# Allegro board AVRUSB500.brd
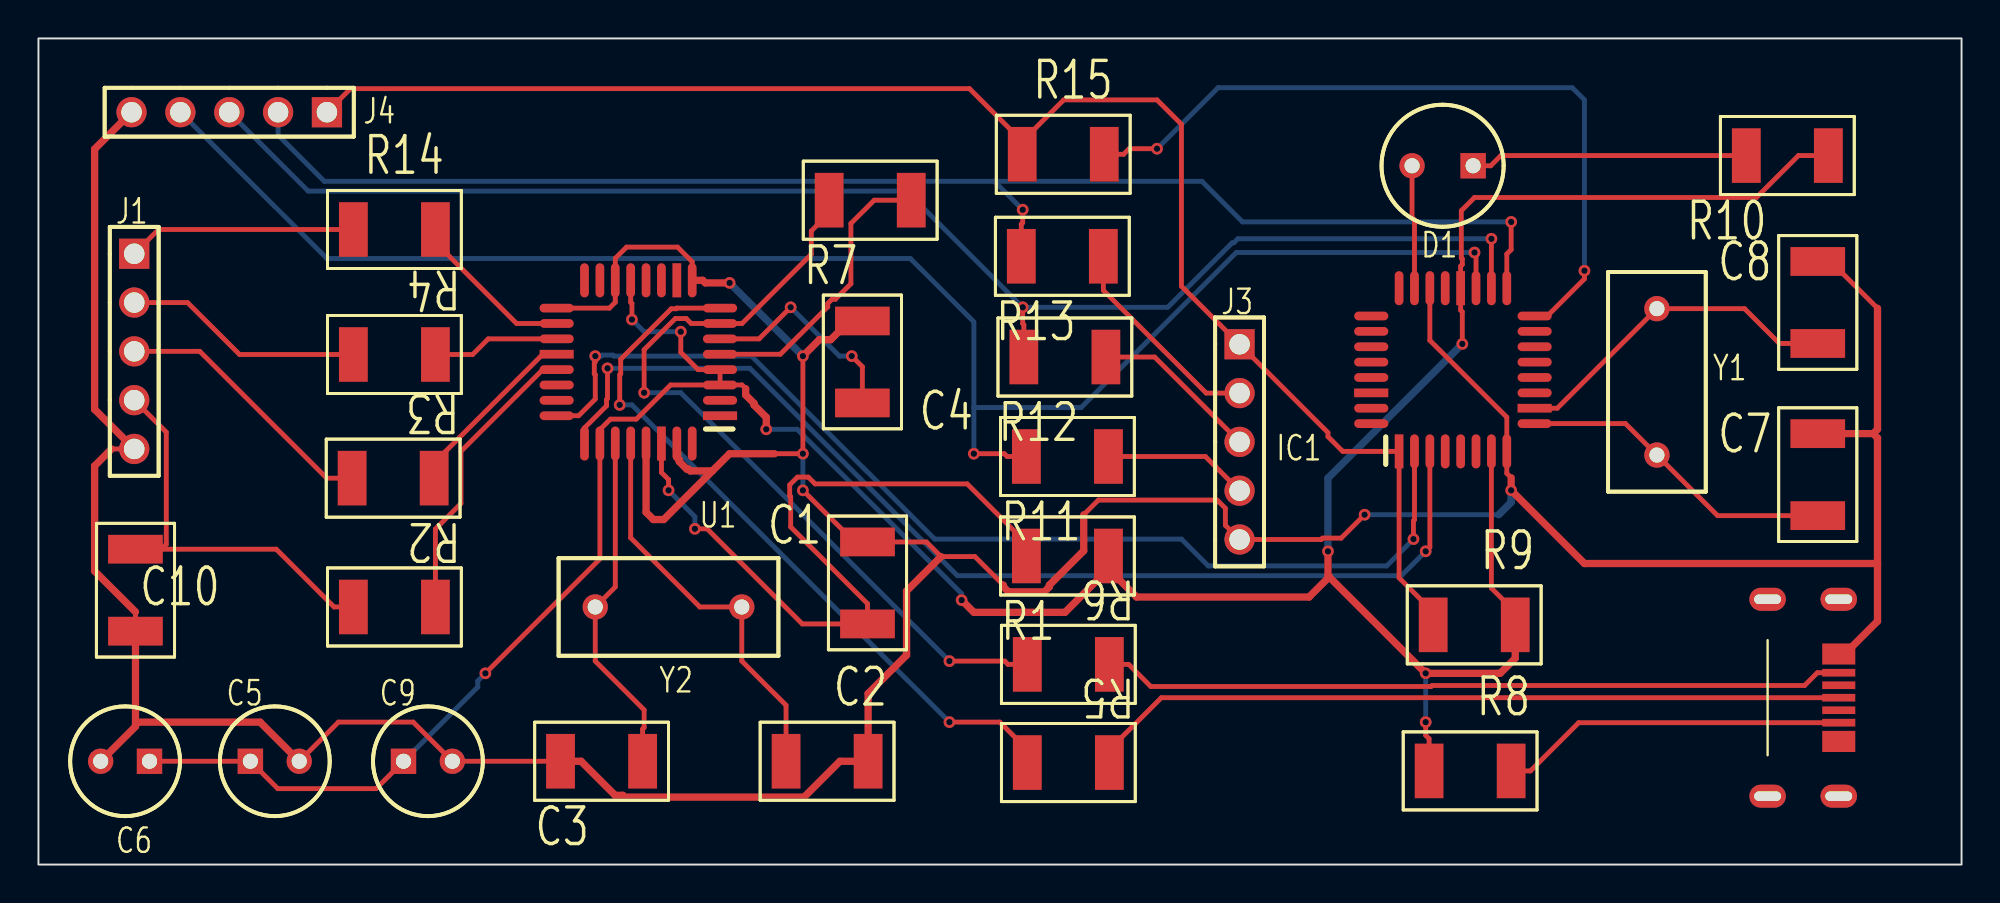
[diagram p0: board, top side]
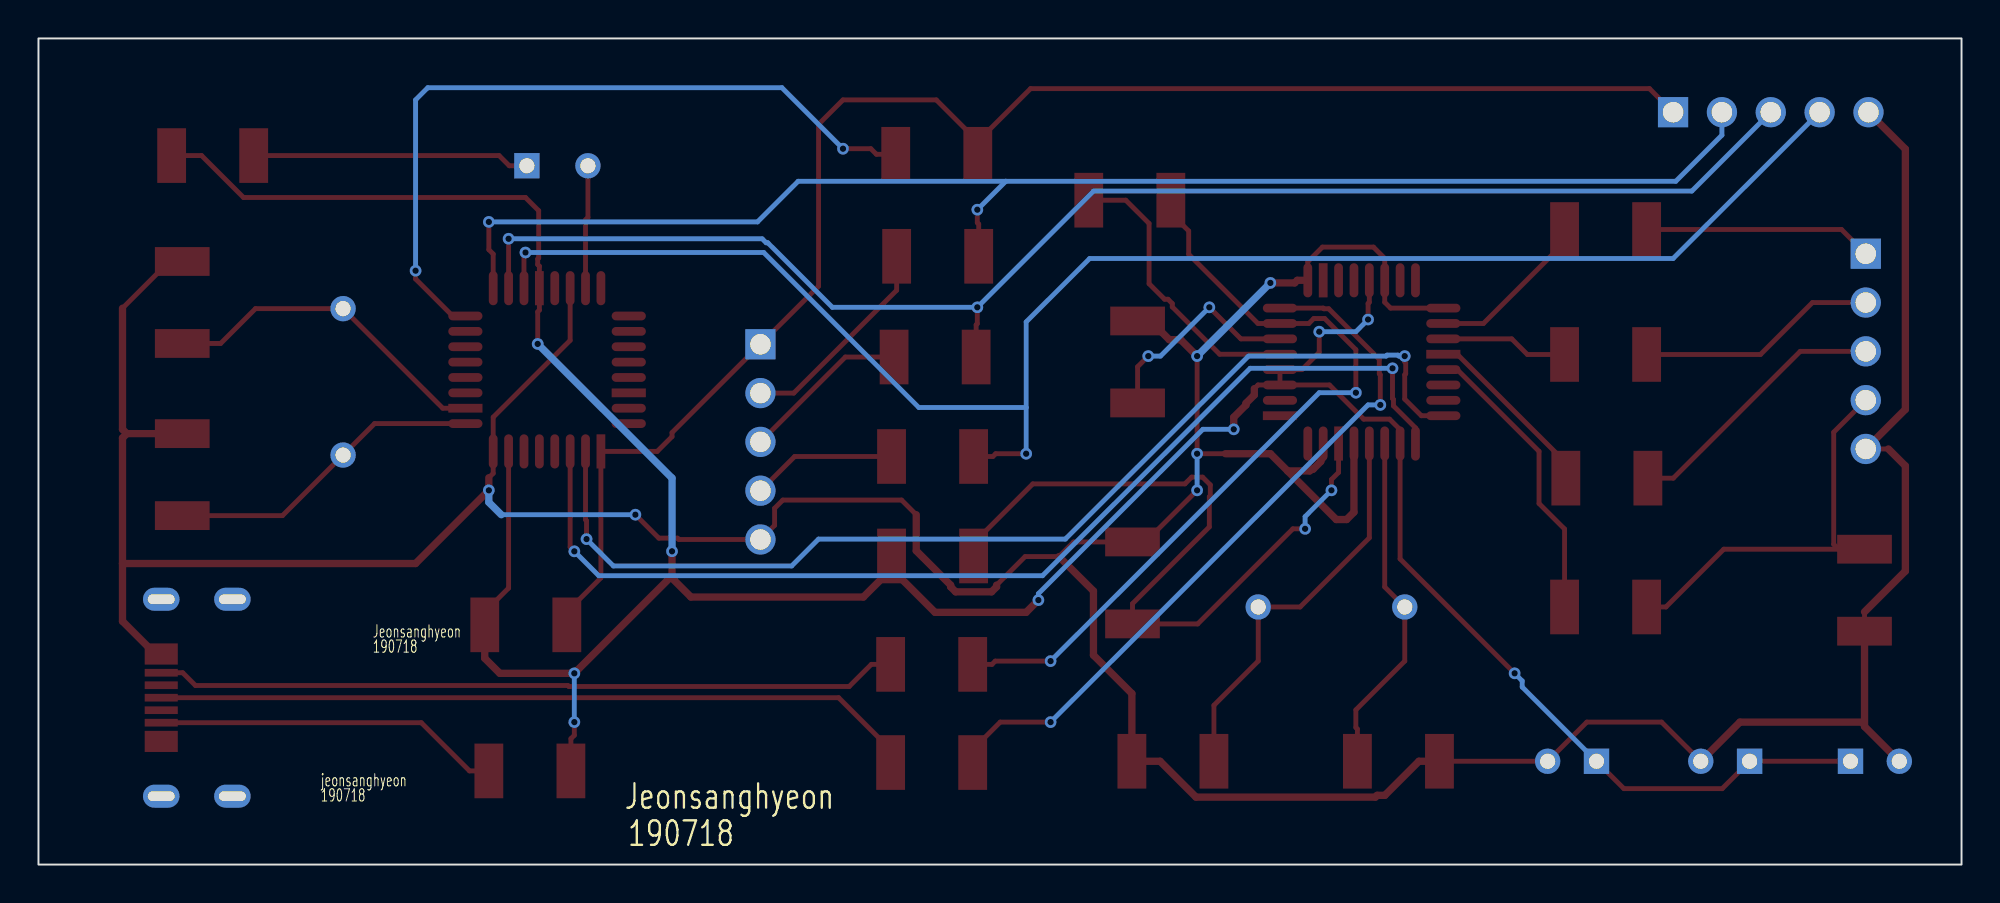
[diagram p1: board, bottom side, seen from below]

Outline 100 x 43 mm; copper layers: TOP, BOTTOM. Coordinates in mm from the lower left corner of the outline.
Outline path: rectangle 0,0 100,43

## Design rules (mm)
constraint set DEFAULT: min track width 0.254
net group POWERNETS: nets GND VCC

## Placement (name value [footprint] x y rotation side)
C1  47nF  [CPCYL1D225LS100031#2]  43.11 16.79 270 top
C2  27pF  [CPCYL1D225LS100031#2]  43.14 5.38 180 top
C3  27pF  [CPCYL1D225LS100031#2]  27.15 5.38 0 top
C4  47nF  [CPCYL1D225LS100031#2]  42.84 24.03 90 top
C5  100nF  [CPCYL1D225LS100031]  11.02 5.38 0 top
C6  1uF  [CPCYL1D225LS100031]  5.78 5.38 180 top
C7  100nF  [CPCYL1D225LS100031#2]  92.52 22.43 270 top
C8  100nF  [CPCYL1D225LS100031#2]  92.52 31.39 270 top
C9  100nF  [CPCYL1D225LS100031]  18.98 5.38 0 top
C10  22nF  [CPCYL1D225LS100031#2]  5.04 12.15 90 top
D1  LED  [CYLD250LS125031]  74.6 36.37 180 top
IC1  ATmega8  [QUAD80M32WG900]  70.75 21.5 0 top
J1  bbpg_Bitbang  [BLKCON100VHTM1SQSW1005]  4.98 31.79 270 top
J2  USBA  [MICRO_USB]  89.92 8.69 270 top
J3  avrusb500_out  [BLKCON100VHTM1SQSW1005]  62.46 27.08 270 top
J4  firmware_in  [BLKCON100VHTM1SQSW1005]  15 39.16 180 top
R1  470  [AX400X100031]  51.37 16.06 0 top
R2  220  [AX400X100031]  20.64 13.41 180 top
R3  220  [AX400X100031]  20.58 20.11 180 top
R4  220  [AX400X100031]  20.64 26.55 180 top
R5  27  [AX400X100031]  55.69 5.31 180 top
R6  27  [AX400X100031]  55.69 10.42 180 top
R7  1.5k  [AX400X100031]  41.12 34.58 0 top
R8  2.2  [AX400X100031]  76.58 4.88 180 top
R9  10k  [AX400X100031]  76.79 12.48 180 top
R10  470  [AX400X100031]  88.81 36.9 0 top
R11  1k  [AX400X100031]  51.37 21.24 0 top
R12  220  [AX400X100031]  51.24 26.42 0 top
R13  1k  [AX400X100031]  51.11 31.66 0 top
R14  220  [AX400X100031]  20.64 33.05 180 top
R15  220  [AX400X100031]  55.42 36.97 180 top
U1  FT232BM  [QUAD80M32WG900]  35.44 23.36 90 top
Y1  3.6864Mhz  [RAD450X200LS300031]  84.16 28.93 270 top
Y2  6Mhz  [RAD450X200LS300031]  36.57 13.41 180 top

## Library data of the parts
C1-C4 C7 C8 C10 = CAPACITOR NON-POL: alternate symbols: (SML2015)
C5 C9 = CAPACITOR NON-POL: alternate symbols: (SMDCAP)
C6 = CAPACITOR POL: alternate symbols: (SMDCAP)
D1 = LED
IC1 = ATmega8-DIL28_1
J1 J3 J4 = CON5
J2 = CON4_7
R1-R15 = R: alternate symbols: (SML2015)
U1 = FT232BM_2: alternate symbols: (JEDECMS026)
Y1 Y2 = ZTA

## Footprints (pads in the part's own frame, mm; a bottom-side part is the same pattern mirrored in y, then rotated)
AX400X100031
  rect 1.499x2.845 smd: 1(0,0) 2(4.267,0)
BLKCON100VHTM1SQSW1005
  rect 1.575x1.575 hole 1.067: 1(0,0)
  round 1.575 hole 1.067: 2(2.54,0) 3(5.08,0) 4(7.62,0) 5(10.16,0)
CPCYL1D225LS100031
  rect 1.321x1.321 hole 0.787: 1(0,0)
  round 1.321 hole 0.787: 2(2.54,0)
CPCYL1D225LS100031#2
  rect 1.499x2.845 smd: 1(0,0) 2(4.267,0)
CYLD250LS125031
  rect 1.321x1.321 hole 0.787: 1(0,0)
  round 1.321 hole 0.787: 2(3.175,0)
MICRO_USB
  oval 1.2x1.9 hole 0.5x1.4: (-5.125,3.7) (-5.125,0) (5.125,3.7) (5.125,0)
  rect 0.4x1.72 smd: (-0.65,3.7) (0.65,3.7) 2(-1.3,3.7) 3(0,3.7) 4(1.3,3.7)
  rect 1.1x1.72 smd: 1(-2.275,3.7) 5(2.275,3.7)
QUAD80M32WG900
  rect 0.457x1.778 smd: 1(0,0) 20(3.2,8.496)
  oval 0.457x1.778 smd: 2(0.8,0) 3(1.6,0) 4(2.4,0) 5(3.2,0) 6(4,0) 7(4.801,0) 8(5.601,0) 17(5.601,8.496) 18(4.801,8.496) 19(4,8.496) 21(2.4,8.496) 22(1.6,8.496) 23(0.8,8.496) 24(0,8.496)
  oval 1.778x0.457 smd: 9(7.048,1.448) 11(7.048,3.048) 12(7.048,3.848) 13(7.048,4.648) 14(7.048,5.448) 15(7.048,6.248) 16(7.048,7.048) 25(-1.448,7.048) 26(-1.448,6.248) 27(-1.448,5.448) 28(-1.448,4.648) 29(-1.448,3.848) 31(-1.448,2.248) 32(-1.448,1.448)
  rect 1.778x0.457 smd: 10(7.048,2.248) 30(-1.448,3.048)
RAD450X200LS300031
  round 1.321 hole 0.787: 1(0,0) 2(7.62,0)

## Nets
+5V: J2.4 R8.1
GND: C1.1 C2.1 C3.1 C4.2 C5.2 C6.2 C7.1 C8.1 C9.2 C10.1 IC1.8 IC1.22 J1.5 J2.1 J3.5 J4.5 U1.9 U1.14 U1.17 U1.29 U1.31
VCC: C5.1 C6.1 C9.1 IC1.7(VCC) IC1.20 R1.2 R8.2 R9.1 R10.2 U1.3 U1.4 U1.13 U1.26
BMISO: J1.3 R3.2
BMOSI: J1.2 R4.2
BRESET: J1.1 R14.2
BSCK: C10.2 J1.4 R2.2
D+: J2.2 R6.1
D-: J2.3 R5.1
F_MISO: IC1.18 J4.3 R12.1
F_MOSI: IC1.17 J4.2 R13.1
F_SCK: IC1.19 J4.4 R11.1
MISO: J3.3 R12.2
MOSI: J3.2 R13.2
RESET: IC1.1 J3.1 J4.1 R9.2 R15.2
RXD: IC1.2 U1.24
SCK: J3.4 R11.2
TXD: IC1.3 U1.25
N02483: R6.2 R7.1 U1.7
N02615: R5.2 U1.8
N03527: C4.1 U1.6
N06839: R2.1 U1.21
N06967: R3.1 U1.20
N07033: R4.1 U1.19
N07247: R14.1 U1.18
N11951: R7.2 U1.5
N41098: C3.2 U1.27 Y2.2
N41106: C2.2 U1.28(XTOUT) Y2.1
N49165: C1.2 R1.1 U1.30
N96485: D1.2(CATHODE) IC1.23
N96489: D1.1 R10.1
N96501: C7.2 IC1.9 Y1.2
N96637: C8.2 IC1.10 Y1.1
N96779: IC1.16 R15.1

Pads without a net: IC1 4 5 6 11 12 13 14 15 21 24 25 26 27 28 29 30 31 32; J2 5; U1 1 2 10 11 12 15 16 22 23 32

## Via types
v1: diameter 0.61, hole 0.33, TOP to BOTTOM, 35 vias

## Routing (per net, layer and track width the routed paths; a pad name or vN(x,y) marks a point on that pad's centre or on a via; arc(x,y) is an arc through that point)
+5V: length 18.1
  TOP w0.254: R8.1 77.58,4.88 80.09,7.38 J2.4
GND: length 242.7
  TOP w0.254: C8.1 93.2,31.39 95.63,28.96 ; C10.1 5.04,13.15 ; 38.28,21.39 v1(39.75,21.39) v1(39.75,26.46) ; C5.2 15.6,7.42 19.48,7.42 C9.2 C3.1 ; 93.92,10.96 J2.1 ; U1.31 33.19,21.11 ; v1(68.96,18.21) 67.74,16.99 66.77,16.99 66.7,16.92 J3.5 61.72,17.66 61.72,18.54 61.29,18.97 55.12,18.97 54.35,18.21 ; 5.04,7.19 5.27,7.42 ; U1.17 29.69,28.96 29.99,29.27 U1.14 29.99,31.55 30.58,32.14 33.23,32.14 33.99,31.38 U1.9 ; 3.8,21.63 J1.5 ; 50.18,14.55 48.69,16.03 46.93,16.03 46.17,16.79 C1.1 42.44,16.79 v1(39.75,19.48) ; IC1.22 72.35,27.28 76.35,23.28 IC1.8 76.35,20.36 76.58,20.14
  TOP w0.381: 38.28,21.39 35.94,21.39 35.04,20.49 ; 95.41,22.43 95.63,22.21 95.63,15.67 ; 95.41,22.43 C7.1 ; 95.41,22.43 95.63,22.65 95.63,28.96 ; 35.04,20.49 32.51,17.96 31.98,17.96 31.59,18.34 U1.29 ; 35.04,20.49 33.9,20.49 33.81,20.58 33.72,20.58 33.32,20.98 33.32,21.07 33.19,21.19 ; C5.2 11.52,7.42 5.27,7.42 ; 5.04,13.15 2.92,15.28 2.92,20.75 3.8,21.63 ; v1(39.75,26.46) 40.61,27.32 41.2,27.32 42.17,28.29 C4.2 ; C10.1 5.04,7.19 C6.2 ; 95.63,15.67 80.39,15.67 v1(76.58,19.48) 76.58,20.14 ; 95.63,15.67 95.63,12.67 93.92,10.96 ; J1.5 2.92,23.69 2.92,37.24 J4.5 ; v1(35.94,30.27) 34.68,30.27 34.54,30.41 U1.9 ; 50.18,14.55 50.18,14.46 50.44,14.2 52.31,14.2 52.57,14.46 52.57,14.55 54.35,16.33 54.35,18.21 ; C3.1 28.21,5.38 29.99,3.61 30.39,3.61 30.48,3.51 39.81,3.51 41.68,5.38 C2.1 43.14,8.9 45.14,10.9 45.14,14.24 46.93,16.03
  BOTTOM w0.254: v1(39.75,19.48) v1(39.75,21.39) ; v1(68.96,18.21) 75.93,18.21
  BOTTOM w0.381: 75.93,18.21 76.58,18.86 v1(76.58,19.48) ; v1(39.75,26.46) v1(35.94,30.27)
VCC: length 163.1
  TOP w0.254: C6.1 C5.1 12.45,3.95 17.56,3.95 C9.1 ; U1.3 32.87,24.96 31.09,23.18 29.74,23.18 29.19,22.64 U1.26 29.19,15.91 v1(23.24,9.96) ; U1.3 36.59,24.96 36.78,24.77 ; U1.3 U1.4 34.3,25.76 33.4,26.66 v1(33.4,27.73) ; R9.1 76.79,13.15 75.55,14.39 IC1.7 ; U1.13 30.79,29.27 30.86,29.2 v1(30.86,28.37) ; v1(74.04,27.1) 74.04,28.77 73.95,28.86 IC1.20 73.95,31.14 74.04,31.23 74.04,31.52 73.99,31.57 73.99,34.03 74.67,34.72 89.34,34.72 91.52,36.9 R10.2 ; R8.2 72.31,6.55 72.14,6.73 v1(72.14,7.42)
  TOP w0.381: 55.64,15.39 R1.2 ; 55.64,15.39 53.38,13.13 48.64,13.13 v1(48.01,13.77) ; 55.64,15.39 57.1,13.93 66.07,13.93 67.12,14.97 ; 36.78,24.77 36.78,24.44 37.21,24.01 37.21,23.92 37.84,23.28 v1(37.84,22.66) ; 67.12,14.97 67.06,15.04 v1(67.06,16.3) ; 67.12,14.97 v1(72.14,9.96) 76.01,9.96 76.79,10.74 R9.1
  BOTTOM w0.254: v1(30.86,28.37) 31.49,27.73 v1(33.4,27.73) ; v1(72.14,9.96) v1(72.14,7.42) ; v1(23.24,9.96) 22.84,9.56 22.84,9.24 C9.1 ; v1(48.01,13.77) 48.01,14.1 39.45,22.66 v1(37.84,22.66)
  BOTTOM w0.381: v1(74.04,27.1) 67.06,20.11 v1(67.06,16.3)
BMISO: length 14.1
  TOP w0.254: R3.2 14.99,20.11 8.39,26.71 J1.3
BMOSI: length 12.5
  TOP w0.254: J1.2 7.75,29.25 10.45,26.55 R4.2
BRESET: length 11.9
  TOP w0.254: R14.2 6.24,33.05 J1.1
BSCK: length 21.1
  TOP w0.254: 6.39,16.41 12.36,16.41 15.37,13.41 R2.2 ; 6.39,16.41 6.65,16.67 6.65,22.51 J1.4 ; 6.39,16.41 C10.2
D+: length 38.7
  TOP w0.254: R6.1 56.69,10.42 57.84,9.27 72.42,9.27 72.47,9.32 91.84,9.32 92.5,9.98 93.61,9.98
D-: length 39.7
  TOP w0.254: R5.1 55.69,5.98 58.39,8.69 J2.3
F_MISO: length 76.5
  TOP w0.254: v1(51.18,29) 51.18,28.15 51.24,28.09 R12.1 ; IC1.18 v1(75.55,32.57)
  BOTTOM w0.254: J4.3 14.02,35.06 45.13,35.06 v1(51.18,29) 58.72,29 62.08,32.36 62.16,32.36 62.37,32.57 v1(75.55,32.57)
F_MOSI: length 75.3
  TOP w0.254: v1(76.58,33.45) 76.58,32.01 76.35,31.78 IC1.17 ; v1(51.18,34.08) 51.18,33.41 51.11,33.34 R13.1
  BOTTOM w0.254: 49.7,35.56 v1(51.18,34.08) ; 49.7,35.56 60.5,35.56 62.61,33.45 v1(76.58,33.45) ; 49.7,35.56 14.86,35.56 12.46,37.96 J4.2
F_SCK: length 86.7
  TOP w0.254: IC1.19 74.75,31.78 v1(74.67,31.86) ; v1(48.64,21.39) 50.22,21.39 50.37,21.24 R11.1
  BOTTOM w0.254: 48.64,23.79 48.64,28.24 45.34,31.54 15,31.54 7.38,39.16 ; 48.64,23.79 54.22,23.79 62.29,31.86 v1(74.67,31.86) ; 48.64,23.79 v1(48.64,21.39)
MISO: length 8.8
  TOP w0.254: R12.2 58.04,26.42 J3.3
MOSI: length 11.1
  TOP w0.254: J3.2 60.73,24.54 55.37,29.89 R13.2
RESET: length 81.4
  TOP w0.254: R9.2 72.53,13.15 70.75,14.92 IC1.1 67.82,21.5 67.06,22.27 67.06,22.48 J3.1 59.44,30.1 59.44,38.53 58.17,39.8 53.31,39.8 51.16,37.64 ; J4.1 16.23,40.39 48.41,40.39 51.16,37.64 ; R15.2 51.16,37.64
RXD: length 56.9
  TOP w0.254: v1(71.5,16.94) 71.5,17.9 71.55,17.95 IC1.2 ; U1.24 28.09,23.36 28.95,24.23 28.95,25.49 28.9,25.55 28.9,26.11 28.95,26.17 v1(28.95,26.46)
  BOTTOM w0.254: v1(71.5,16.94) 70.1,15.54 60.83,15.54 59.44,16.94 46.6,16.94 37.08,26.46 29.93,26.46 29.87,26.52 29.31,26.52 29.25,26.46 v1(28.95,26.46)
SCK: length 7.6
  TOP w0.254: J3.4 60.68,21.24 R11.2
TXD: length 57.2
  TOP w0.254: IC1.3 72.35,16.52 v1(72.14,16.3) ; v1(29.59,25.83) 29.59,24.26 29.54,24.21 29.54,23.87 28.39,22.73 U1.25
  BOTTOM w0.254: v1(29.59,25.83) 36.99,25.83 47.79,15.04 70.86,15.04 v1(72.14,16.3)
N02483: length 42.2
  TOP w0.254: R6.2 50.42,10.42 50.25,10.59 v1(47.37,10.59) ; R7.1 41.12,33.91 40.19,32.98 40.19,31.77 36.59,28.16 U1.7 33.94,28.16 33.68,28.42 33.12,28.42 31.49,26.8 v1(31.49,24.56)
  BOTTOM w0.254: v1(47.37,10.59) 33.4,24.56 v1(31.49,24.56)
N02615: length 38
  TOP w0.254: R5.2 51.42,5.98 49.99,7.42 v1(47.37,7.42) ; v1(30.23,23.93) 30.23,25.49 30.28,25.55 30.28,26.3 32.91,28.93 33.16,28.93 33.19,28.96 U1.8
  BOTTOM w0.254: v1(47.37,7.42) 30.86,23.93 v1(30.23,23.93)
N03527: length 11.2
  TOP w0.254: v1(42.29,26.46) 42.84,25.91 C4.1 ; U1.6 37.47,27.36 v1(39.12,29)
  BOTTOM w0.254: v1(39.12,29) 41.66,26.46 v1(42.29,26.46)
N06839: length 15.4
  TOP w0.254: U1.21 26.22,25.76 21.97,21.51 21.97,18.79 20.64,17.47 R2.1
N06967: length 9.5
  TOP w0.254: R3.1 20.58,20.92 26.22,26.56 U1.20
N07033: length 6.6
  TOP w0.254: R4.1 22.58,26.55 23.39,27.36 U1.19
N07247: length 8.7
  TOP w0.254: R14.1 20.64,32.38 24.86,28.16 U1.18
N11951: length 15.2
  TOP w0.254: R7.2 43.46,34.58 42.25,33.37 42.25,30.23 41.44,29.43 41.26,29.43 41.04,29.2 41.04,29.03 38.58,26.56 U1.5
N41098: length 18.1
  TOP w0.254: U1.27 29.99,14.45 Y2.2 28.95,10.59 31.49,8.05 31.49,7.13 31.41,7.05 C3.2
N41106: length 21.2
  TOP w0.254: C2.2 38.88,8.29 36.57,10.59 Y2.1 34.39,13.41 30.79,17.01 U1.28
N49165: length 39.7
  TOP w0.254: v1(34.13,17.48) 34.77,17.48 39.72,12.53 C1.2 43.11,13.58 39.12,17.57 39.12,19.14 39.06,19.2 39.06,19.76 39.47,20.17 40.03,20.17 40.38,19.81 48.29,19.81 51.37,16.74 R1.1 ; U1.30 32.39,20.41 32.77,20.04 v1(32.77,19.48)
  BOTTOM w0.254: v1(34.13,17.48) 34.13,18.11 v1(32.77,19.48)
N96485: length 6.4
  TOP w0.254: D1.2 71.43,33.68 71.55,33.56 IC1.23
N96489: length 14.4
  TOP w0.254: D1.1 75.52,36.37 76.05,36.9 R10.1
N96501: length 16.7
  TOP w0.254: IC1.9 82.52,22.95 87.31,18.16 C7.2
N96637: length 17.6
  TOP w0.254: C8.2 90.53,27.12 88.72,28.93 Y1.1 78.98,23.75 IC1.10
N96779: length 39.4
  TOP w0.254: v1(58.17,37.26) 56.72,37.26 56.43,36.97 R15.1 ; IC1.16 78.46,28.55 80.39,30.48 v1(80.39,30.91)
  BOTTOM w0.254: v1(58.17,37.26) 61.34,40.43 79.75,40.43 80.39,39.8 v1(80.39,30.91)

## Text on the board
Ref Des/Silkscreen Bottom: Jeonsanghyeon | 190718 | jeonsanghyeon
NCLEGEND-1-2: FIGURE | SIZE | 0.33 | 0.7869 | 1.0671 | 1.4x0.5001 | DRILL CHART: TOP to BOTTOM | ALL UNITS ARE IN MILLIMETERS | PLATED | QTY | 23 | 56 | 15 | 4
